# Altium PCB 175-00024_rev1, Backplane, Instrument Crate.PcbDoc (part 2 of 4)
Units mil, origin at the board's own origin, x right, y up, seen from the top; angles counter-clockwise.
Board outline 8400 x 10183.07 mil, 8 copper layers (Top Layer (*.GTL), Mid-Layer 1 (*.G1), +24V (*.GP1), RTN (*.GP2), +3.3V (*.GP3), +12V (*.GP4), Signal GND (*.GP5), Bottom Layer (*.GBL)); 192 components, 150 nets, 1439 pads, 415 vias.
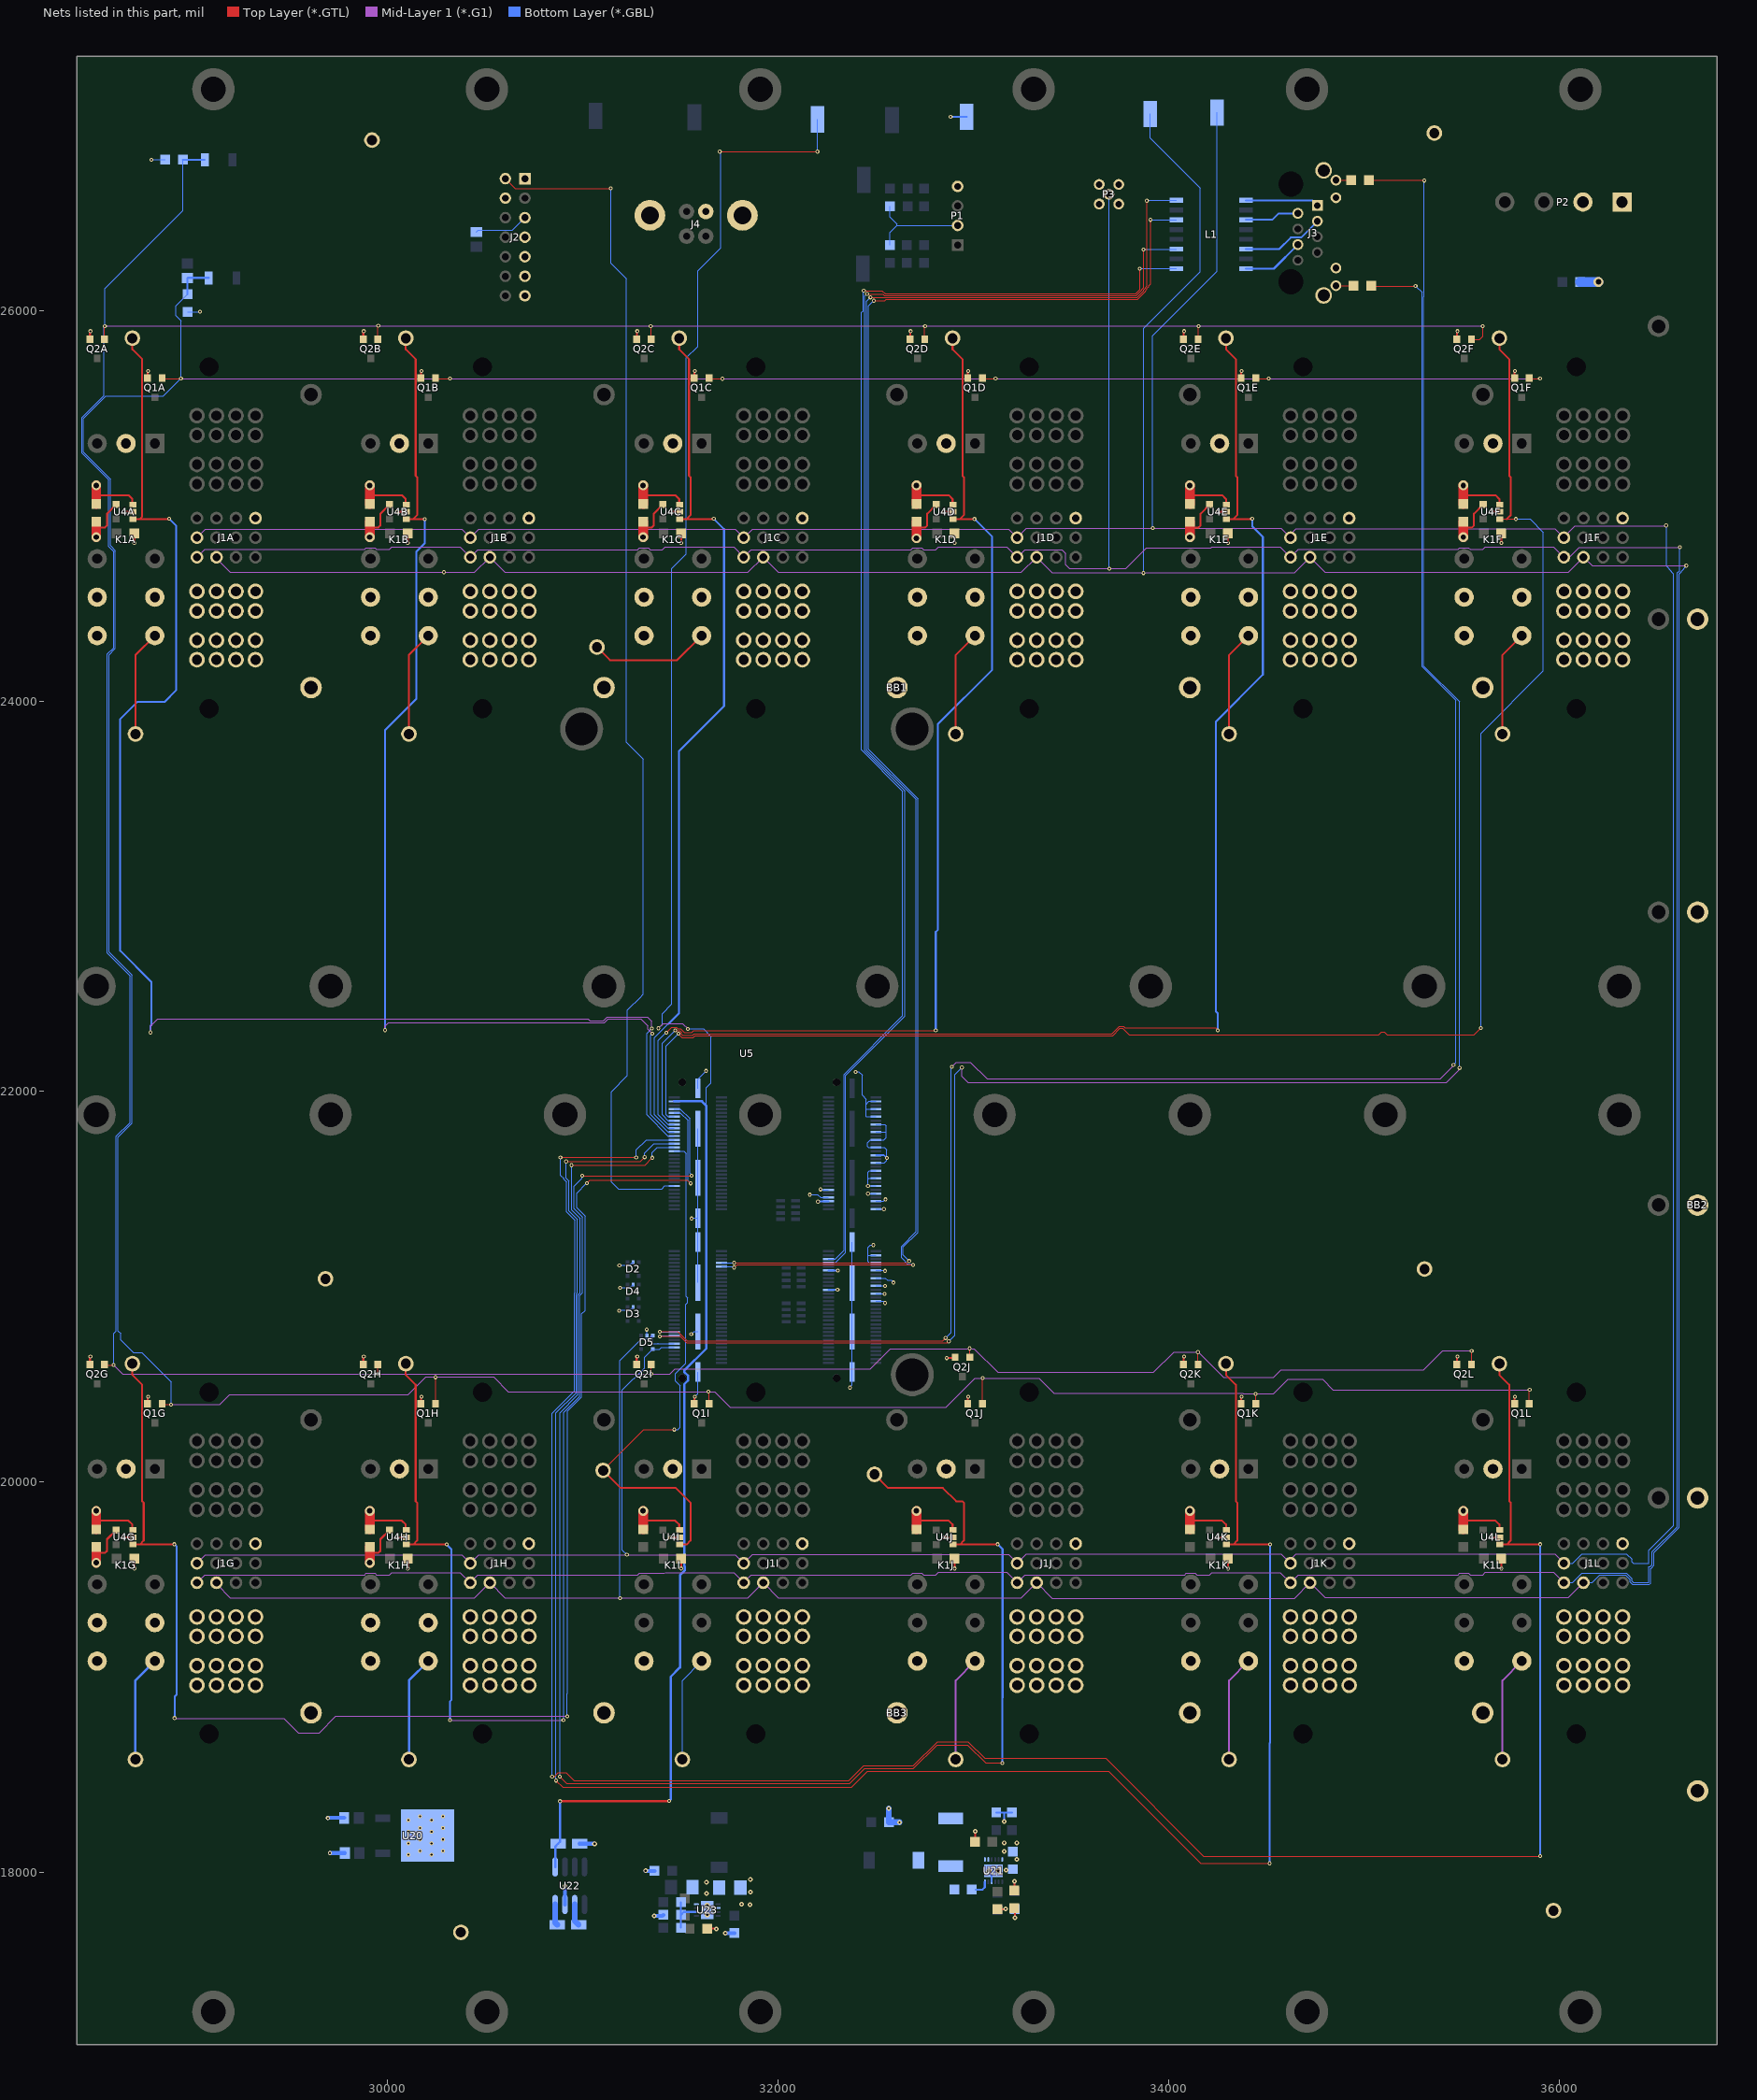
[diagram p8: the nets of this part, all layers, seen from the top]

## Via types
v1: diameter 20, hole 10, Top Layer (*.GTL) to Bottom Layer (*.GBL), 337 vias
v2: diameter 24, hole 10, Top Layer (*.GTL) to Bottom Layer (*.GBL), 48 vias
v3: diameter 50, hole 28, Top Layer (*.GTL) to Bottom Layer (*.GBL), 26 vias
v4: diameter 25.98, hole 12.99, Top Layer (*.GTL) to Bottom Layer (*.GBL), tented top, 4 vias

## Nets (pads, with @x,y where several pads share a name; then routed paths per layer and width w, separated by ;. In a path a pad name is that pad's centre, name@x,y a point inside that pad or via, vN(x,y) a via of type N, cw(c..) or ccw(c..) an arc to the next point about the centre after c; other vN are vias at no path point) (continued)
+24V: BB1.1 BB2.1 BB3.1 C15.2 C18.2 K1A.3 K1B.3 K1C.3 K1D.3 K1E.3 K1F.3 K1G.3 K1H.3 K1I.3 K1J.3 K1K.3 K1L.3 P2.1 P2.2 R4A.1 R4B.1 R4C.1 R4D.1 R4E.1 R4F.1 R4G.1 R4H.1 R4I.1 R4J.1 R4K.1 R4L.1 R29.1 R35.2 TP9.1 U4A.3 U4B.3 U4C.3 U4D.3 U4E.3 U4F.3 U4G.3 U4H.3 U4I.3 U4J.3 U4K.3 U4L.3 U5.B55 U5.B71 U5.B81 U21.12 U23.2 | length 4166.4
  Top Layer (*.GTL) w10: 28509.99,19797.82 28514.99,19802.82 28674.99,19802.82 28694.99,19782.82 28694.99,19757.82 U4G.3@28697.99,19754.82 ; 28510,25049 28515,25054 28675,25054 28695,25034 28695,25009 U4A.3@28698,25006 ; 29909.99,19797.82 29914.99,19802.82 30074.99,19802.82 30094.99,19782.82 30094.99,19757.82 U4H.3@30097.99,19754.82 ; 29910,25049 29915,25054 30075,25054 30095,25034 30095,25009 U4B.3@30098,25006 ; 31309.99,19797.82 31314.99,19802.82 31474.99,19802.82 31494.99,19782.82 31494.99,19757.82 U4I.3@31497.99,19754.82 ; 31310,25049 31315,25054 31475,25054 31495,25034 31495,25009 U4C.3@31498,25006 ; R35.2@31638.98,17714 31681.98,17714 v2(31684.98,17711) ; 32709.99,19797.82 32714.99,19802.82 32874.99,19802.82 32894.99,19782.82 32894.99,19757.82 U4J.3@32897.99,19754.82 ; 32710,25049 32715,25054 32875,25054 32895,25034 32895,25009 U4D.3@32898,25006 ; R29.1@33008.8,18158.34 33011.8,18161.34 v2(33011.8,18211.34) ; 34109.99,19797.82 34114.99,19802.82 34274.99,19802.82 34294.99,19782.82 34294.99,19757.82 U4K.3@34297.99,19754.82 ; 34110,25049 34115,25054 34275,25054 34295,25034 34295,25009 U4E.3@34298,25006 ; 35509.99,19797.82 35514.99,19802.82 35674.99,19802.82 35694.99,19782.82 35694.99,19757.82 U4L.3@35697.99,19754.82 ; 35510,25049 35515,25054 35675,25054 35695,25034 35695,25009 U4F.3@35698,25006
  Top Layer (*.GTL) w50: R4G.1@28509.99,19757.82 28509.99,19797.82 v3(28509.99,19852.82) ; R4A.1@28510,25009 28510,25049 v3(28510,25104) ; R4H.1@29909.99,19757.82 29909.99,19797.82 v3(29909.99,19852.82) ; R4B.1@29910,25009 29910,25049 v3(29910,25104) ; R4I.1@31309.99,19757.82 31309.99,19797.82 v3(31309.99,19852.82) ; R4C.1@31310,25009 31310,25049 v3(31310,25104) ; R4J.1@32709.99,19757.82 32709.99,19797.82 v3(32709.99,19852.82) ; R4D.1@32710,25009 32710,25049 v3(32710,25104) ; R4K.1@34109.99,19757.82 34109.99,19797.82 v3(34109.99,19852.82) ; R4E.1@34110,25009 34110,25049 v3(34110,25104) ; R4L.1@35509.99,19757.82 35509.99,19797.82 v3(35509.99,19852.82) ; R4F.1@35510,25009 35510,25049 v3(35510,25104)
  Bottom Layer (*.GBL) w10: v1(32205.89,21436.25) 32207.57,21437.94 U5.B55@32259.28,21437.94 ; U5.B81@32259.28,20985.18 32303.9,20985.18 v1@32304,20985.08 ; U5.B71@32259.28,21083.61 32307.53,21083.61 v1(32308,21084.08) ; v1(32885,26991.08) TP9.1@32967,26991.08
  other v1: 32306,20985
  other v2: 31857.98,17836 31813.98,17838 31859.98,17901 31858.98,17965 33223.8,18068.34 33158.8,18108.34 33158.8,18153.34 33223.8,18153.34
-12V: C16.2 TP28.1 U5.A3 U22.5 | length 10704.1
  Top Layer (*.GTL) w5: v1(31703,26813.08) v1(32203,26813.08)
  Top Layer (*.GTL) w12: v1(30885,18366.08) v1@31446,18366.08
  Mid-Layer 1 (*.G1) w5: v1(31388,22324.08) 31413,22349.08 31512,22349.08 v1(31540,22321.08)
  Bottom Layer (*.GBL) w5: v1(31388,22324.08) 31408,22344.08 31408,22399.08 31457,22448.08 31457,24679.08 31532,24754.08 31532,25758.08 31590,25816.08 31590,26202.08 31709,26321.08 31709,26807.08 v1(31703,26813.08) ; v1(31540,22321.08) 31619.08,22321.08 31658,22282.16 31658,22044.08 31635,22021.08 31635,21926.08 ; v1(32203,26813.08) 32204,26814.08 TP28.1@32204,26978.08
  Bottom Layer (*.GBL) w12: U22.5@30860,18030.06 30860,18133.6 C16.2@30875,18148.6 30885,18158.6 v1(30885,18366.08) ; v1(31443,18368.08) 31451,18376.08 31451,19003.08 31499,19051.08 31499,19523.55 31524.99,19549.53 31524.99,19566.1 31521,19570.09 31521,20042.73 31521.56,20043.29 31521.56,20092.35 31521,20092.91 31521,20500.82 31540.54,20520.36 31540.54,20545.28 31521,20564.82 31521,20571.08 31635,20685.08 31635,21926.08 31611.33,21949.75 U5.A3@31469.12,21949.75
EMU: J2.2 U5.A47 | length 6127.2
  Top Layer (*.GTL) w5: J2.2@30605,26675.08 30656,26624.08 31143,26624.08 v1(31144,26625.08)
  Bottom Layer (*.GBL) w5: v1@31145,26625.08 31145,26240.5 31224,26161.5 31224,23788.99 31300.14,23712.85 31302.77,23710.22 31305.41,23707.58 31308.04,23704.95 31310.68,23702.31 31310.68,22498.49 31308.04,22495.85 31305.41,22493.22 31302.77,22490.58 31300.14,22487.94 31230,22417.81 31230,22081.81 31148,21999.81 31148,21537.35 31184.7,21500.65 31405.97,21500.65 31422,21516.68 U5.A47@31469.12,21516.68
ETHERLED_ACT: R7.1 U5.A103 | length 9913.1
  Top Layer (*.GTL) w5: v1(31396,20770.8) 31489,20770.8 31536.73,20723.08 32844,20723.08 v1(32859,20738.08) ; R7.1@35041,26125.08 v1(35266,26125.08)
  Mid-Layer 1 (*.G1) w5: v1(32891,22126.08) 32915,22150.08 32987,22150.08 33071.2,22065.88 35393,22065.88 35460,22132.88 v1(35460,22137.08)
  Bottom Layer (*.GBL) w5: v1(31396,20770.8) 31398.16,20768.65 U5.A103@31469.12,20768.65 ; v1(32859,20738.08) 32887,20766.08 32887,22122.08 v1(32891,22126.08) ; v1(35266,26125.08) 35299,26092.08 35299,24175.08 35471.2,24002.88 35471.2,22149.28 v1@35459,22137.08
ETHERLED_FD: R6.1 U5.A105 | length 10547.7
  Top Layer (*.GTL) w5: v1(31396,20746.8) 31500.28,20746.8 31533,20714.08 32868.94,20714.08 v1(32875.97,20721.11) ; R6.1@35026,26667.08 35308,26667.08 v1(35310,26665.08)
  Mid-Layer 1 (*.G1) w5: v1(32943,22123.08) 32943,22078.08 32975,22046.08 35424,22046.08 35491,22113.08 v1(35491,22121.08)
  Bottom Layer (*.GBL) w5: v1(31396,20746.8) 31398.16,20748.96 U5.A105@31469.12,20748.96 ; v1(32875.97,20721.11) 32906.8,20751.94 32906.8,22086.88 v1(32943,22123.08) ; v1(35310,26665.08) 35310,26071.08 35308,26069.08 35308,24178.81 35491,23995.81 v1(35491,22121.08)
ETHERRX+: L1.11 U5.B67 | length 7037
  Top Layer (*.GTL) w5: v1(32457.09,26083.99) 32538.54,26083.99 32546.51,26076.02 33835.73,26076.02 33864,26104.29 33864,26108.02 33873,26117.02 v1(33873,26312.08)
  Bottom Layer (*.GBL) w5: U5.B67@32259.28,21122.98 32295,21122.98 32348,21175.98 32348,22083.08 32651,22386.08 32651,23540.08 32446,23745.08 32446,26072.9 v1(32457.09,26083.99) ; v1(33873,26312.08) 33875,26314.08 L1.11@34042,26314.08
ETHERRX-: L1.9 U5.B65 | length 6954.4
  Top Layer (*.GTL) w5: v1(32440.12,26100.96) 32534.3,26100.96 32550.24,26085.02 33832,26085.02 33855,26108.02 v1@33855,26214.08
  Bottom Layer (*.GBL) w5: U5.B65@32259.28,21142.66 32295,21142.66 32339,21186.66 32339,22086.81 32640,22387.81 32640,23538.35 32429,23749.35 32429,25990.08 32437,25998.08 32437,26097.84 v1(32440.12,26100.96) ; v1(33854,26213.08) 33855,26214.08 L1.9@34042,26214.08
ETHERTX+: L1.16 U5.A70 | length 8161.2
  Top Layer (*.GTL) w5: v1(31776,21098.98) 31791,21113.98 32690.5,21113.98 v1(32692,21112.48) ; v1(32474.06,26067.02) 33839.46,26067.02 33873,26100.56 33873,26104.29 33882,26113.29 33882,26117.02 33891,26126.02 v1@33891,26564.08
  Bottom Layer (*.GBL) w5: U5.A70@31712.43,21103.29 31771.69,21103.29 v1(31776,21098.98) ; v1(32474.06,26067.02) 32455,26047.96 32455,23748.81 32708,23495.81 32708,21282.53 32633,21207.53 32633,21148.15 32665.37,21115.78 32688.7,21115.78 v1(32692,21112.48) ; v1(33890,26562.08) 33892,26564.08 L1.16@34042,26564.08
ETHERTX-: L1.14 U5.A68 | length 7963.7
  Top Layer (*.GTL) w5: v1(31776,21122.98) 32662.9,21122.98 v1(32672.2,21132.28) ; v1(32491.03,26050.05) 32547.03,26050.05 32555,26058.02 33843.18,26058.02 33882,26096.84 33882,26100.56 33891,26109.56 33891,26113.29 33900,26122.29 33900,26126.02 33909,26135.02 v1@33909,26464.08
  Bottom Layer (*.GBL) w5: U5.A68@31712.43,21122.98 v1(31776,21122.98) ; v1(32491.03,26050.05) 32464,26023.02 32464,23752.53 32717,23499.53 32717,21278.81 32642,21203.81 32642,21162.48 v1(32672.2,21132.28) ; v1(33908,26464.08) L1.14@34042,26464.08
GND: C2A.1 C2B.1 C2C.1 C2D.1 C2E.1 C2F.1 C2G.1 C2H.1 C2I.1 C2J.1 C2K.1 C2L.1 C3.1 C4.1 C10.2 C12.2 C13.1 C14.1 C15.1 C16.1 C18.1 C19.1 D2.2 D3.2 D4.2 D5.2 J1A.12 J1B.12 J1C.12 J1D.12 J1E.12 J1F.12 J1G.12 J1H.12 J1I.12 J1J.12 J1K.12 J1L.12 J2.1 J2.4 J2.7 J2.9 J2.11 J2.13 J3.10 J3.11 J3.13 J3.14 J4.4 J4.5 J4.6 P1.2 P1.4 P3.2 P3.3 P3.4 P3.5 Q1A.2 Q1B.2 Q1C.2 Q1D.2 Q1E.2 Q1F.2 Q1G.2 Q1H.2 Q1I.2 Q1J.2 Q1K.2 Q1L.2 Q2A.2 Q2B.2 Q2C.2 Q2D.2 Q2E.2 Q2F.2 Q2G.2 Q2H.2 Q2I.2 Q2J.2 Q2K.2 Q2L.2 R1.2 R2.1 R3.1 R30.1 R31.1 R34.1 R38.1 R39.1 R40.1 TP1.1 TP2.1 TP3.1 TP6.1 TP7.1 TP8.1 U4A.2 U4B.2 U4C.2 U4D.2 U4E.2 U4F.2 U4G.2 U4H.2 U4I.2 U4J.2 U4K.2 U4L.2 U5.A121 U5.A122 U5.B4 U5.B8 U5.B12 U5.B16 U5.B20 U5.B24 U5.B28 U5.B32 U5.B36 U5.B40 U5.B44 U5.B48 U5.B49 U5.B52 U5.B53 U5.B56 U5.B60 U5.B64 U5.B68 U5.B72 U5.B76 U5.B80 U5.B84 U5.B88 U5.B122 U20.2 U21.4 U21.13 U22.3 U23.8 U23.9 | length 7872.7
  Top Layer (*.GTL) w10: Q2G.2@28477.59,20599.08 Q2G.2@28477.59,20602.03 v1@28477.59,20640.42 ; Q2A.2@28477.6,25850.26 Q2A.2@28477.6,25853.21 v1@28477.6,25891.6 ; v1(28649.99,19717.82) U4G.2@28697.99,19717.82 ; v1(28650,24969) U4A.2@28698,24969 ; v1(28704.99,19557.82) C2G.1@28704.99,19607.82 ; v1(28705,24809) C2A.1@28705,24859 ; Q1G.2@28772.59,20399.08 Q1G.2@28772.59,20402.03 28772.59,20435.42 v1(28774.99,20437.82) ; Q1A.2@28772.6,25650.26 Q1A.2@28772.6,25653.21 28772.6,25686.6 v1(28775,25689) ; Q2H.2@29877.59,20599.08 Q2H.2@29877.59,20602.03 v1@29877.59,20640.42 ; Q2B.2@29877.6,25850.26 Q2B.2@29877.6,25853.21 v1@29877.6,25891.6 ; v1(30049.99,19717.82) U4H.2@30097.99,19717.82 ; v1(30050,24969) U4B.2@30098,24969 ; v1(30104.99,19557.82) C2H.1@30104.99,19607.82 ; v1(30105,24809) C2B.1@30105,24859 ; Q1H.2@30172.59,20399.08 Q1H.2@30172.59,20402.03 30172.59,20435.42 v1(30174.99,20437.82) ; Q1B.2@30172.6,25650.26 Q1B.2@30172.6,25653.21 30172.6,25686.6 v1(30175,25689) ; Q2I.2@31277.59,20599.08 Q2I.2@31277.59,20602.03 v1@31277.59,20640.42 ; Q2C.2@31277.6,25850.26 Q2C.2@31277.6,25853.21 v1@31277.6,25891.6 ; v1(31449.99,19717.82) U4I.2@31497.99,19717.82 ; v1(31450,24969) U4C.2@31498,24969 ; v1(31504.99,19557.82) C2I.1@31504.99,19607.82 ; v1(31505,24809) C2C.1@31505,24859 ; Q1I.2@31572.59,20399.08 Q1I.2@31572.59,20402.03 31572.59,20435.42 v1(31574.99,20437.82) ; Q1C.2@31572.6,25650.26 Q1C.2@31572.6,25653.21 31572.6,25686.6 v1(31575,25689) ; Q2D.2@32677.6,25850.26 Q2D.2@32677.6,25853.21 v1@32677.6,25891.6 ; v1(32849.99,19717.82) U4J.2@32897.99,19717.82 ; v1(32850,24969) U4D.2@32898,24969 ; v1(32864.5,20635.14) 32865.76,20636.4 Q2J.2@32908.1,20636.4 ; v1(32904.99,19557.82) C2J.1@32904.99,19607.82 ; v1(32905,24809) C2D.1@32905,24859 ; Q1J.2@32972.59,20399.08 Q1J.2@32972.59,20402.03 32972.59,20435.42 v1(32974.99,20437.82) ; Q1D.2@32972.6,25650.26 Q1D.2@32972.6,25653.21 32972.6,25686.6 v1(32975,25689) ; R34.1@33123.8,17813.34 33165.8,17813.34 v2(33166.8,17814.34) ; C14.1@33211.8,17908.34 33211.8,17954.34 v2(33212.8,17955.34) ; Q2K.2@34077.59,20599.08 Q2K.2@34077.59,20602.03 v1@34077.59,20640.42 ; Q2E.2@34077.6,25850.26 Q2E.2@34077.6,25853.21 v1@34077.6,25891.6 ; v1(34249.99,19717.82) U4K.2@34297.99,19717.82 ; v1(34250,24969) U4E.2@34298,24969 ; v1(34304.99,19557.82) C2K.1@34304.99,19607.82 ; v1(34305,24809) C2E.1@34305,24859 ; Q1K.2@34372.59,20399.08 Q1K.2@34372.59,20402.03 34372.59,20435.42 v1(34374.99,20437.82) ; Q1E.2@34372.6,25650.26 Q1E.2@34372.6,25653.21 34372.6,25686.6 v1(34375,25689) ; Q2L.2@35477.59,20599.08 Q2L.2@35477.59,20602.03 v1@35477.59,20640.42 ; Q2F.2@35477.6,25850.26 Q2F.2@35477.6,25853.21 v1@35477.6,25891.6 ; v1(35649.99,19717.82) U4L.2@35697.99,19717.82 ; v1(35650,24969) U4F.2@35698,24969 ; v1(35704.99,19557.82) C2L.1@35704.99,19607.82 ; v1(35705,24809) C2F.1@35705,24859 ; Q1L.2@35772.59,20399.08 Q1L.2@35772.59,20402.03 35772.59,20435.42 v1(35774.99,20437.82) ; Q1F.2@35772.6,25650.26 Q1F.2@35772.6,25653.21 35772.6,25686.6 v1(35775,25689)
  Bottom Layer (*.GBL) w5: v1(28793,26772.08) R3.1@28863,26772.08 ; R2.1@28977,25993.08 v1(29042,25993.08) ; v1(31188,20877.6) 31190.66,20880.26 31242.53,20880.26 31258.88,20896.6 D3.2@31259.53,20896.6 D3.2@31259.53,20891.13 ; v1(31189,21109.6) 31189.66,21110.26 31242.53,21110.26 31258.88,21126.6 D2.2@31259.53,21126.6 D2.2@31259.53,21121.13 ; v1(31193,20994.6) 31193.66,20995.26 31242.53,20995.26 31258.88,21011.6 D4.2@31259.53,21011.6 D4.2@31259.53,21006.13 ; D5.2@31329.53,20751.6 v1(31329.53,20781.13) ; v1(31557,20758.08) 31570.52,20771.6 U5.A122@31590.78,20771.6 ; v1(31558,21350.08) 31559.44,21351.52 U5.A121@31590.78,21351.52 ; v1(31574.99,20437.82) 31590.78,20453.61 U5.A122@31590.78,20564.12 ; U5.A122@31590.78,21021.6 U5.A122@31590.78,21229.08 U5.A121@31590.78,21351.52 ; U5.A121@31590.78,21809 31590.5,21808.72 31590.5,21559.28 U5.A121@31590.78,21559 U5.A121@31590.78,21351.52 ; U5.A121@31590.78,22016.48 31590.78,22063.85 v1(31633,22106.08) ; v1(32164,21472) 32204.08,21472 32219,21457.08 32219.54,21457.62 U5.B53@32259.28,21457.62 ; v1(32219,21499.08) 32221.09,21496.99 U5.B49@32259.28,21496.99 ; v1(32370,20484.08) 32370,20487.21 32380.93,20498.15 U5.B122@32380.93,20564.12 U5.B122@32380.93,20771.6 U5.B122@32380.93,21021.6 U5.B122@32380.93,21229.08 ; v1(32398,22101.08) 32415,22101.08 32432,22084.08 32432,21981.08 32453,21960.08 32453,21935.08 ; 32453.7,21910.38 U5.B8@32502.59,21910.38 ; 32461.27,21162.35 U5.B64@32502.59,21162.35 ; v1(32462,21477.08) 32460.46,21477.08 32460.23,21477.31 U5.B52@32502.59,21477.31 ; v1(32462,21516.08) v1@32462,21516.68 ; v1(32489,21214.08) 32474,21214.08 32461,21201.08 32461,21129.08 32467.1,21122.98 U5.B68@32502.59,21122.98 ; U5.B88@32502.59,20926.13 32539.95,20926.13 v1(32549,20917.08) ; U5.B84@32502.59,20965.5 32545.58,20965.5 v1(32547,20964.08) ; U5.B80@32502.59,21004.87 32547.79,21004.87 v1@32548,21005.08 ; U5.B76@32502.59,21044.24 32551.51,21044.24 32561.17,21034.58 32580.5,21034.58 v1(32593,21022.08) ; U5.B72@32502.59,21083.61 32546.47,21083.61 v1@32548,21082.08 ; U5.B60@32502.59,21398.57 32542.51,21398.57 v1(32543,21398.08) ; U5.B56@32502.59,21437.94 32540.86,21437.94 v1(32551,21448.08) ; U5.B48@32502.59,21516.68 v1@32462,21516.68 ; U5.B44@32502.59,21556.05 32465.97,21556.05 32462,21552.08 ; U5.B40@32502.59,21595.42 32469.34,21595.42 32462,21588.08 32462,21552.08 ; U5.B36@32502.59,21634.79 32544.71,21634.79 32558,21648.08 v1(32558,21660.08) 32558,21676.08 32558,21701.08 32545.55,21713.53 U5.B28@32502.59,21713.53 32464.55,21713.53 32459,21719.08 32459,21739.08 32472.82,21752.9 U5.B24@32502.59,21752.9 32543.82,21752.9 32555,21764.08 32555,21792.08 ; U5.B20@32502.59,21792.27 32554.81,21792.27 32555,21792.08 ; U5.B16@32502.59,21831.64 32547.44,21831.64 32555,21824.08 32555,21792.08 ; U5.B12@32502.59,21871.01 32453.07,21871.01 32453,21871.08 32453,21935.08 ; U5.B4@32502.59,21949.75 32467.67,21949.75 32453,21935.08 ; C3.1@32575,26334.08 32575,26399.08 32611,26435.08 ; C4.1@32575,26534.08 32575,26479.08 32611,26443.08 32611,26435.08 ; P1.2@32921,26435.08 32611,26435.08 ; v1@32462,21516.68 32462,21552.08
  Bottom Layer (*.GBL) w8: U5.B32@32502.59,21674.16 32543.92,21674.16 v1(32558,21660.08)
  Bottom Layer (*.GBL) w10: U21.4@33095.65,17953.34 33095.65,18001.57 U21.13@33104.51,18010.43 ; R30.1@33118.8,18308.34 33159.8,18308.34 ; v2(33159.8,18261.34) 33159.8,18308.34 ; R31.1@33198.8,18308.34 33159.8,18308.34
  Bottom Layer (*.GBL) w20: v1(29696,18280) 29697,18281 C12.2@29779.6,18281 ; v1(29707,18101) C10.2@29782.6,18101 ; U22.3@30910,17837.14 v2(30910,17931.6) ; C16.1@30985,18148.6 v2(31062,18148.6) ; v2(31322.98,18010) 31323.98,18009 R38.1@31368.98,18009 ; v2(31366.98,17779) 31408.98,17779 R39.1@31413.98,17784 ; v2(31731.98,17691) R40.1@31777.98,17691
  Bottom Layer (*.GBL) w30: v2(32568.8,18328.34) C13.1@32568.8,18258.34 v2(32623.8,18258.34)
  Bottom Layer (*.GBL) w50: R1.2@36107.48,26146.08 v3(36202.48,26146.08)
  other v1: 28479.99,20642.82 29879.99,20642.82 31279.99,20642.82 34079.99,20642.82 35479.99,20642.82 32549,21005 32549,21082 28480,25894 29880,25894 31280,25894 32680,25894 34080,25894 35480,25894
  other v2: 31635,17894 31634,17951 33168.8,18013.34
  other v4: 31638.98,17785.38 31638.98,17832.62 33080.89,18010.43 33128.13,18010.43
GPS_DATA: J1A.1 J1B.1 J1C.1 J1D.1 J1E.1 J1F.1 J1G.1 J1H.1 J1I.1 J1J.1 J1K.1 J1L.1 P3.1 | length 22990.9
  Mid-Layer 1 (*.G1) w5: J1G.1@29025.5,19485.14 29065.78,19525.42 29884.07,19525.42 29891.64,19532.98 29937.79,19532.98 29945.35,19525.42 30010.92,19525.42 30022.92,19537.42 30373.22,19537.42 J1H.1@30425.5,19485.14 30464.78,19524.42 31283.07,19524.42 31291.64,19532.98 31418.48,19532.98 31422.16,19536.65 31773.99,19536.65 J1I.1@31825.5,19485.14 31864.78,19524.42 32683.07,19524.42 32691.64,19532.98 32737.79,19532.98 32746.35,19524.42 32809.92,19524.42 32823.92,19538.42 33172.22,19538.42 J1J.1@33225.5,19485.14 33264.78,19524.42 34083.07,19524.42 34091.64,19532.98 34137.79,19532.98 34146.35,19524.42 34209.92,19524.42 34222.92,19537.42 34573.22,19537.42 J1K.1@34625.5,19485.14 34665.78,19525.42 35484.07,19525.42 35491.64,19532.98 35537.79,19532.98 35545.35,19525.42 35610.92,19525.42 35623.92,19538.42 35972.22,19538.42 J1L.1@36025.5,19485.14 ; J1A.1@29025.51,24736.32 29065.79,24776.6 29884.08,24776.6 29891.65,24784.16 29937.8,24784.16 29945.36,24776.6 30010.93,24776.6 30022.93,24788.6 30373.24,24788.6 J1B.1@30425.51,24736.32 30464.79,24775.6 31283.08,24775.6 31291.65,24784.16 31337.8,24784.16 31346.36,24775.6 31409.93,24775.6 31422.17,24787.83 31774,24787.83 J1C.1@31825.51,24736.32 31864.79,24775.6 32683.08,24775.6 32691.65,24784.16 32737.8,24784.16 32746.36,24775.6 32809.93,24775.6 32823.93,24789.6 33172.24,24789.6 J1D.1@33225.51,24736.32 33264.79,24775.6 33455.48,24775.6 33475,24756.08 33475,24697.08 33493,24679.08 33781.99,24679.08 33887.07,24784.16 34218.5,24784.16 34222.93,24788.6 34573.24,24788.6 J1E.1@34625.51,24736.32 34665.79,24776.6 35484.08,24776.6 35491.65,24784.16 35537.8,24784.16 35545.36,24776.6 35610.93,24776.6 35623.93,24789.6 35972.24,24789.6 J1F.1@36025.51,24736.32 36053.24,24736.32 36104,24787.08 v1(36619,24787.08)
  Bottom Layer (*.GBL) w5: P3.1@33696,26595.08 33696,24679.08 v1(33697,24678.08) ; J1L.1@36025.5,19485.14 36070.35,19485.14 36118.35,19533.14 36345.38,19533.14 36373.5,19505.02 36373.5,19492.3 36380.65,19485.14 36460,19485.14 36460,19567.14 36467.46,19567.14 36478,19577.69 36478,19643.62 36606,19771.62 36606,24656.81 36611.27,24662.08 36615,24662.08 36618.5,24665.58 v1@36618.5,24787.08
I2C_SCL: D5.4 J1A.5 J1B.5 J1C.5 J1D.5 J1E.5 J1F.5 J1G.5 J1H.5 J1I.5 J1J.5 J1K.5 J1L.5 TP13.1 U5.A111 | length 24314
  Mid-Layer 1 (*.G1) w5: J1G.5@29025.5,19585.14 29068.78,19628.42 30382.22,19628.42 J1H.5@30425.5,19585.14 30468.78,19628.42 31782.22,19628.42 J1I.5@31825.5,19585.14 31869.78,19629.42 33181.22,19629.42 J1J.5@33225.5,19585.14 33272.78,19632.42 34578.22,19632.42 J1K.5@34625.5,19585.14 34625.5,19602.93 34653.99,19631.42 35979.22,19631.42 J1L.5@36025.5,19585.14 ; J1A.5@29025.51,24836.32 29068.79,24879.6 30382.24,24879.6 J1B.5@30425.51,24836.32 30468.79,24879.6 31782.24,24879.6 J1C.5@31825.51,24836.32 31869.79,24880.6 33181.24,24880.6 J1D.5@33225.51,24836.32 33272.79,24883.6 34578.24,24883.6 J1E.5@34625.51,24836.32 34625.51,24854.11 34654,24882.6 35979.24,24882.6 J1F.5@36025.51,24836.32 36025.51,24838.59 36083,24896.08 36546,24896.08 v1(36549,24899.08)
  Bottom Layer (*.GBL) w5: v1(31227,19629.08) 31204,19652.08 31204,20471.08 31317.4,20584.48 31317.4,20639.08 D5.4@31359.06,20680.73 31394.13,20680.73 31403.31,20689.91 U5.A111@31469.12,20689.91 ; v1(33920,24885.08) 33920,25871.08 34249,26200.08 TP13.1@34249,27013.08 ; J1L.5@36025.5,19585.14 36070.35,19585.14 36118.35,19633.14 36345.38,19633.14 36373.5,19605.02 36373.5,19592.3 36380.65,19585.14 36460,19585.14 36460,19651.08 36588,19779.08 36588,24653.08 36584.27,24653.08 36575.5,24661.85 36575.5,24665.58 36550.5,24690.58 36550.5,24897.58 v1(36549,24899.08)
I2C_SDA: D5.3 J1A.2 J1B.2 J1C.2 J1D.2 J1E.2 J1F.2 J1G.2 J1H.2 J1I.2 J1J.2 J1K.2 J1L.2 TP12.1 U5.A109 | length 25042.3
  Mid-Layer 1 (*.G1) w5: J1G.2@29125.5,19485.14 29125.5,19477.91 29195.99,19407.42 30447.78,19407.42 J1H.2@30525.5,19485.14 30603.22,19407.42 31847.78,19407.42 J1I.2@31925.5,19485.14 32003.22,19407.42 33247.78,19407.42 J1J.2@33325.5,19485.14 33405.22,19405.42 34645.78,19405.42 J1K.2@34725.5,19485.14 34801.99,19408.65 36049.01,19408.65 J1L.2@36125.5,19485.14 ; J1A.2@29125.51,24736.32 29125.51,24729.09 29196,24658.6 30447.79,24658.6 J1B.2@30525.51,24736.32 30603.24,24658.6 31847.79,24658.6 J1C.2@31925.51,24736.32 32003.24,24658.6 33247.79,24658.6 J1D.2@33325.51,24736.32 33405.24,24656.6 34645.79,24656.6 J1E.2@34725.51,24736.32 34802,24659.83 36049.02,24659.83 J1F.2@36125.51,24736.32 36169.76,24692.08 36651,24692.08 v1(36652,24693.08)
  Bottom Layer (*.GBL) w5: v1(31192,19406.08) 31192,20623.08 31304.18,20735.26 31340.09,20735.26 31356.44,20751.6 D5.3@31359.06,20751.6 31359.06,20710.54 ; 31360,20709.59 31386.99,20709.59 ; 31386.99,20710.61 31386.99,20709.59 ; U5.A109@31469.12,20709.59 31386.99,20709.59 ; v1(33873,24655.08) 33873,25909.08 34163,26199.08 34163,26627.08 33907,26883.08 TP12.1@33907,27006.08 ; J1L.2@36125.5,19485.14 36170.35,19485.14 36209.35,19524.14 36341.65,19524.14 36364.5,19501.3 36364.5,19488.57 36376.93,19476.14 36463.73,19476.14 36469,19481.41 36469,19558.14 36471.18,19558.14 36487,19573.96 36487,19639.89 36615,19767.89 36615,24653.08 36618.73,24653.08 36627.5,24661.85 36627.5,24665.58 v1@36652.5,24690.58
  other v1: 30290,24659.6
IMON_SLOT1: TP11A.1 U4A.1 U5.A21 | length 7363.1
  Top Layer (*.GTL) w10: TP11A.1@28695,25858 28695,25800.64 28745.5,25750.14 28745.5,24944.5 28733,24932 ; U4A.1@28698,24932 28733,24932 ; v1(28883,24934.08) 28880.92,24932 28733,24932
  Mid-Layer 1 (*.G1) w5: v1(28787.95,22302.86) 28787.95,22337.03 28824,22373.08 31029,22373.08 31039,22363.08 31107.38,22363.08 31126.38,22382.08 31332,22382.08 31355,22359.08 v1(31355,22323.08)
  Bottom Layer (*.GBL) w5: v1(31355,22323.08) 31329.57,22297.65 31329.57,21881.01 31438,21772.58 U5.A21@31469.12,21772.58
  Bottom Layer (*.GBL) w10: v1(28787.95,22302.86) 28787.95,22337.03 28792,22341.08 28792,22562.08 28633,22721.08 28633,23907.88 28720.2,23995.08 28859.2,23995.08 28920,24055.88 28920,24897.08 v1(28883,24934.08)
IMON_SLOT2: TP11B.1 U4B.1 U5.A19 | length 5774.9
  Top Layer (*.GTL) w10: TP11B.1@30095,25858 30095,25800.64 30145.5,25750.14 30145.5,25153.5 30153,25146 30153,24952 30133,24932 ; U4B.1@30098,24932 30133,24932 ; v1(30192,24931.08) 30191.08,24932 30133,24932
  Mid-Layer 1 (*.G1) w5: v1(29988.74,22314.67) 29988.74,22334.82 30007,22353.08 31111.52,22353.08 31130.52,22372.08 31299,22372.08 31334,22337.08 31334,22320.08 v1(31358,22296.08)
  Bottom Layer (*.GBL) w5: v1(31358,22296.08) 31349.26,22287.34 31349.26,21881.01 31438,21792.27 U5.A19@31469.12,21792.27
  Bottom Layer (*.GBL) w10: v1(29988.74,22314.67) 29989,22314.93 29989,23851.08 30149,24011.08 30149,24765.08 30192,24808.08 v1(30192,24931.08)
IMON_SLOT3: TP11C.1 U4C.1 U5.A17 | length 4483
  Top Layer (*.GTL) w10: TP11C.1@31495,25858 31495,25800.64 31545.5,25750.14 31545.5,25153.5 31553,25146 31553,24952 31533,24932 ; U4C.1@31498,24932 31533,24932 ; v1(31672,24933.08) 31670.92,24932 31533,24932
  Bottom Layer (*.GBL) w5: 31440.09,22346.99 31368.94,22275.85 31368.94,21881.01 31438,21811.95 U5.A17@31469.12,21811.95
  Bottom Layer (*.GBL) w10: 31440.09,22346.99 31494,22400.9 31494,23742.88 31725,23973.88 31725,24880.08 v1(31672,24933.08)
IMON_SLOT4: TP11D.1 U4D.1 U5.A15 | length 5788.9
  Top Layer (*.GTL) w5: v1(31429,22301.08) 31457.06,22329.14 ; 31457.06,22329.55 31480.86,22329.55 31488.83,22321.58 31501.56,22321.58 31521.06,22302.08 31559.46,22302.08 31569.46,22312.08 v1@32809,22312.08
  Top Layer (*.GTL) w10: TP11D.1@32895,25858 32895,25800.64 32945.5,25750.14 32945.5,25153.5 32953,25146 32953,24952 32933,24932 ; U4D.1@32898,24932 32933,24932 ; v1(33007,24932.08) 33006.92,24932 32933,24932
  Bottom Layer (*.GBL) w5: v1@31428.56,22301.52 31388.63,22261.59 31388.63,21881.01 31438,21831.64 U5.A15@31469.12,21831.64
  Bottom Layer (*.GBL) w10: v1(32809,22313.08) 32809,22817.08 32819,22827.08 32819,23880.88 33098,24159.88 33098,24841.08 v1(33007,24932.08)
IMON_SLOT5: TP11E.1 U4E.1 U5.A13 | length 7193.5
  Top Layer (*.GTL) w5: v1(31474.03,22313.05) 31479.33,22307.75 31484.17,22312.58 31497.83,22312.58 31507.5,22302.91 31507.5,22292.31 31511.73,22288.08 31564.73,22288.08 31572.73,22296.08 33710.94,22296.08 33748.44,22333.58 33769.56,22333.58 33777.06,22326.08 34241,22326.08 v1(34253,22314.08)
  Top Layer (*.GTL) w10: TP11E.1@34295,25858 34295,25800.64 34345.5,25750.14 34345.5,25153.5 34353,25146 34353,24952 34333,24932 ; U4E.1@34298,24932 34333,24932 ; v1(34429,24933.08) 34427.92,24932 34333,24932
  Bottom Layer (*.GBL) w5: U5.A13@31469.12,21851.32 31438,21851.32 31408.31,21881.01 31408.31,22247.33 v1(31474.03,22313.05)
  Bottom Layer (*.GBL) w10: v1(34253,22314.08) 34253,22400.08 34244,22409.08 34244,23895.08 34484,24135.08 34484,24840.08 34429,24895.08 v1(34429,24933.08)
IMON_SLOT6: TP11F.1 U4F.1 U5.A11 | length 8544
  Top Layer (*.GTL) w5: v1(31491,22296.08) 31510,22277.08 31566.46,22277.08 31576.46,22287.08 33714.67,22287.08 33752.17,22324.58 33765.83,22324.58 33799.33,22291.08 35076.67,22291.08 35091.17,22305.58 35104.83,22305.58 35119.33,22291.08 35566,22291.08 v1(35600,22325.08) v1@35601,22325.08 ; U4F.1@35698,24932 35733,24932 35778.92,24932 v1(35779,24932.08)
  Top Layer (*.GTL) w10: TP11F.1@35695,25858 35695,25800.64 35745.5,25750.14 35745.5,25153.5 35753,25146 35753,24952 35733,24932
  Bottom Layer (*.GBL) w5: U5.A11@31469.12,21871.01 31438,21871.01 31428,21881.01 31428,22233.08 v1(31491,22296.08) ; v1(35600,22325.08) 35601,22326.08 35601,23835.08 35920,24154.08 35920,24864.08 35852,24932.08 v1(35779,24932.08)
IMON_SLOT7: TP11G.1 U4G.1 U5.A9 | length 7912.7
  Top Layer (*.GTL) w5: v1(31022,21531.08) 31023,21531.08 31038,21546.08 31536.92,21546.08 v1(31553,21530)
  Top Layer (*.GTL) w10: TP11G.1@28694.99,20606.82 28694.99,20549.46 28745.49,20498.96 28745.49,19902.32 28752.99,19894.82 28752.99,19700.82 28732.99,19680.82 ; U4G.1@28697.99,19680.82 28732.99,19680.82 ; v1(28910,19682.08) 28908.74,19680.82 28732.99,19680.82
  Mid-Layer 1 (*.G1) w5: v1@28911,18791.08 29470.54,18791.08 29545.54,18716.08 29652.27,18716.08 29737.07,18800.88 v1(30921.8,18800.88)
  Bottom Layer (*.GBL) w5: v1(30921.8,18800.88) 30921.8,18915.88 30924,18918.08 30924,20365.26 30994.77,20436.03 30994.77,20861.03 31013,20879.26 31013,21362.08 30970,21405.08 30970,21479.08 v1(31022,21531.08) ; U5.A9@31469.12,21890.69 31501,21890.69 31540,21851.69 31540,21543 v1(31553,21530)
  Bottom Layer (*.GBL) w10: v1(28910,19682.08) 28922,19670.08 28922,18912.95 28912,18902.95 28912,18793.08 v1(28911,18792.08)
IMON_SLOT8: TP11H.1 U4H.1 U5.A7 | length 6485.4
  Top Layer (*.GTL) w5: v1(30998,21569.08) v1@31564,21569.08
  Top Layer (*.GTL) w10: TP11H.1@30094.99,20606.82 30094.99,20549.46 30145.49,20498.96 30145.49,19902.32 30152.99,19894.82 30152.99,19700.82 30132.99,19680.82 ; U4H.1@30097.99,19680.82 30132.99,19680.82 ; v1(30304.74,19680.82) 30132.99,19680.82
  Mid-Layer 1 (*.G1) w5: v1@30322,18781.08 v1(30902,18781.08)
  Bottom Layer (*.GBL) w5: v1(30902,18781.08) 30904,18783.08 30904,18918.08 30904,20357.99 30985.77,20439.76 30985.77,20954.85 31000,20969.08 31000,21356.69 30957,21399.69 30957,21516.08 30998,21557.08 v1(30998,21569.08) ; U5.A7@31469.12,21910.38 31501,21910.38 31550,21861.38 31550,21581.76 31562.68,21569.08 v1@31564,21569.08
  Bottom Layer (*.GBL) w10: v1(30304.74,19680.82) 30328,19657.56 30328,18883.95 30322,18877.95 v1(30322,18782.08)
  other v1: 31559,21569.08
IMON_SLOT9: TP11I.1 U4I.1 U5.A29 | length 2765.9
  Top Layer (*.GTL) w5: TP11I.1@31105.5,20060.14 31314.44,20269.08 v1(31470,20269.08)
  Top Layer (*.GTL) w10: TP11I.1@31105.5,20060.14 31195.5,19970.14 31477.67,19970.14 31552.99,19894.82 31552.99,19700.82 31532.99,19680.82 U4I.1@31497.99,19680.82
  Bottom Layer (*.GBL) w5: U5.A29@31469.12,21693.84 31519.24,21693.84 31531,21682.08 31531,20950.91 31538.5,20943.41 31538.5,20920.24 31529,20910.74 31529,20609.49 31474.88,20555.37 31474.88,20518.08 31499.5,20493.46 31499.5,20281.58 31487,20269.08 v1(31470,20269.08)
IMON_SLOT10: TP11J.1 U4J.1 U5.A27 | length 8269.7
  Top Layer (*.GTL) w5: v1(30883.8,18491.88) 30918.6,18457.08 32369,18457.08 32446,18534.08 32695,18534.08 32815.54,18654.62 32971,18654.62 33063.82,18561.81 v1@33150,18561.81 ; v1(30944,21623.08) 30945,21624.08 31320,21624.08 v1(31357,21661.08)
  Top Layer (*.GTL) w10: TP11J.1@32495.5,20040.14 32565.5,19970.14 32845.5,19970.14 32913.32,19902.32 32945.49,19902.32 32952.99,19894.82 32952.99,19700.82 32932.99,19680.82 ; U4J.1@32897.99,19680.82 32932.99,19680.82 ; v1(33126,19682.08) 33124.74,19680.82 32932.99,19680.82
  Bottom Layer (*.GBL) w5: v1(30883.8,18491.88) 30883.8,18641.88 30884,18642.08 30884,20355.31 30976.77,20448.08 30976.77,20958.85 30987,20969.08 30987,21351.31 30944,21394.31 v1(30944,21623.08) ; v1(31357,21661.08) 31357,21687.08 31383.45,21713.53 U5.A27@31469.12,21713.53
  Bottom Layer (*.GBL) w10: v1(33126,19682.08) 33151,19657.08 33151,18895.95 33150,18894.95 v1(33150,18562.08)
IMON_SLOT11: TP11K.1 U4K.1 U5.A25 | length 10556.4
  Top Layer (*.GTL) w5: v1(30864,18472.08) 30899,18437.08 32377.28,18437.08 32459.28,18519.08 33693,18519.08 34165,18047.08 v1@34518,18047.08 ; v1(30916,21642.08) 30917,21643.08 31297,21643.08 v1(31318,21664.08)
  Top Layer (*.GTL) w10: TP11K.1@34294.99,20606.82 34294.99,20549.46 34345.49,20498.96 34345.49,19902.32 34352.99,19894.82 34352.99,19700.82 34332.99,19680.82 ; U4K.1@34297.99,19680.82 34332.99,19680.82 ; v1(34521,19681.08) 34520.74,19680.82 34332.99,19680.82
  Bottom Layer (*.GBL) w5: v1(30864,18472.08) 30864,20353.69 30967.77,20457.47 30967.77,20962.85 30974,20969.08 30974,21345.92 30931,21388.92 30931,21542.08 30916,21557.08 v1(30916,21642.08) ; v1(31318,21664.08) 31318,21685.08 31366.13,21733.21 U5.A25@31469.12,21733.21
  Bottom Layer (*.GBL) w10: v1(34518,18048.08) 34519,18049.08 34519,18663.08 34521,18665.08 v1(34521,19681.08)
IMON_SLOT12: TP11L.1 U4L.1 U5.A23 | length 12065.1
  Top Layer (*.GTL) w5: v1(30844.2,18491.88) 30855.51,18491.88 30875.51,18511.88 30916.49,18511.88 30957.14,18471.22 32363.14,18471.22 32440.14,18548.22 32695,18548.22 32817.86,18671.08 32974.73,18671.08 33059,18586.81 33678.63,18586.81 34180.36,18085.08 v1(35904,18085.08) ; v1@30888,21664.08 31273,21664.08 v1(31275,21662.08)
  Top Layer (*.GTL) w10: TP11L.1@35694.99,20606.82 35694.99,20549.46 35745.49,20498.96 35745.49,19902.32 35752.99,19894.82 35752.99,19700.82 35732.99,19680.82 ; U4L.1@35697.99,19680.82 35732.99,19680.82 ; v1(35904,19682.08) 35902.74,19680.82 35732.99,19680.82
  Bottom Layer (*.GBL) w5: v1(30844.2,18491.88) 30844.2,18641.88 30844,18642.08 30844,20352.08 30958.77,20466.85 30958.77,20966.85 30961,20969.08 30961,21340.54 30918,21383.54 30918,21536.69 30903,21551.69 30903,21555.08 30887,21571.08 v1(30887,21663.08) ; v1(31275,21662.08) 31275,21701.08 31326.82,21752.9 U5.A23@31469.12,21752.9
  Bottom Layer (*.GBL) w10: v1(35904,18085.08) v1(35904,19682.08)
MANUAL_PWR_OFF: C1.2 Q1A.1 Q1B.1 Q1C.1 Q1D.1 Q1E.1 Q1F.1 Q1G.1 Q1H.1 Q1I.1 Q1J.1 Q1K.1 Q1L.1 R2.2 S1.2 | length 21718.4
  Top Layer (*.GTL) w5: Q1G.1@28847.39,20399.08 28849.39,20397.08 v1(28893,20397.08) ; Q1A.1@28847.4,25650.26 28942.18,25650.26 v1(28944,25652.08) ; Q1H.1@30247.39,20399.08 30247.39,20536.47 v1(30248,20537.08) ; Q1B.1@30247.4,25650.26 30320.18,25650.26 v1(30321,25651.08) ; v1(31644,20463.08) 31647.39,20459.69 Q1I.1@31647.39,20399.08 ; Q1C.1@31647.4,25650.26 31715.82,25650.26 v1(31716,25650.08) ; Q1J.1@33047.39,20399.08 33047.39,20531.47 v1(33049,20533.08) ; Q1D.1@33047.4,25650.26 33113.18,25650.26 v1(33115,25652.08) ; v1(34447,20451.08) 34447.39,20450.69 Q1K.1@34447.39,20399.08 ; Q1E.1@34447.4,25650.26 34513.18,25650.26 v1(34514,25651.08) ; Q1L.1@35847.39,20399.08 35847.39,20470.47 v1(35850,20473.08) ; Q1F.1@35847.4,25650.26 35902.18,25650.26 v1(35903,25651.08)
  Mid-Layer 1 (*.G1) w5: v1(28893,20397.08) 29144,20397.08 29194,20447.08 30107,20447.08 30198,20538.08 30544,20538.08 30619,20463.08 v1(31644,20463.08) 31676,20463.08 31756,20383.08 32862,20383.08 33010,20531.08 33338,20531.08 33414.76,20454.32 34381.82,20454.32 34383.06,20453.08 34540,20453.08 34613,20526.08 34789,20526.08 34842,20473.08 v1(35850,20473.08) ; v1@28945,25651.08 v1(30321,25651.08) v1(34514,25651.08) v1(35903,25651.08)
  Bottom Layer (*.GBL) w5: 28635,20763.08 28635,20761.08 ; v1(28893,20397.08) 28893,20513.08 28743,20663.08 28701,20663.08 28635,20729.08 28635,20761.08 ; R2.2@28977,26083.08 28917,26023.08 28917,25974.08 28944,25947.08 v1(28944,25652.08) 28853,25561.08 28559,25561.08 28445,25447.08 28445,25274.08 28582.36,25136.71 28582.36,24795.44 28608,24769.81 28608,24269.08 28575,24236.08 28575,22713.81 28693,22595.81 28693,21838.08 28621.5,21766.58 28621.5,20774.58 28635,20761.08
  Bottom Layer (*.GBL) w10: R2.2@28977,26083.08 C1.2@28977,26165.68 28978.32,26167 S1.2@29086,26167
MANUAL_PWR_ON: Q2A.1 Q2B.1 Q2C.1 Q2D.1 Q2E.1 Q2F.1 Q2G.1 Q2H.1 Q2I.1 Q2J.1 Q2K.1 Q2L.1 R3.2 S2.2 | length 21747
  Top Layer (*.GTL) w5: Q2G.1@28552.39,20599.08 28598,20599.08 v1(28599,20600.08) ; Q2A.1@28552.4,25850.26 28552.4,25918.48 v1(28554,25920.08) ; v1(29952,20554.08) 29952.39,20554.47 Q2H.1@29952.39,20599.08 ; Q2B.1@29952.4,25850.26 29952.4,25920.48 v1(29954,25922.08) ; v1(31349,25920.08) 31352.4,25916.68 Q2C.1@31352.4,25850.26 ; v1(31352,20554.08) 31352.39,20554.47 Q2I.1@31352.39,20599.08 ; Q2D.1@32752.4,25850.26 32752.4,25918.48 v1(32754,25920.08) ; v1(32982,20685.08) 32982.9,20684.18 Q2J.1@32982.9,20636.4 ; v1(34151,20666.08) 34152.39,20664.69 Q2K.1@34152.39,20599.08 ; Q2E.1@34152.4,25850.26 34152.4,25917.48 v1(34155,25920.08) ; Q2L.1@35552.39,20599.08 35553,20599.69 v1(35553,20672.08) ; Q2F.1@35552.4,25850.26 35593.18,25850.26 35610,25867.08 v1(35610,25920.08)
  Mid-Layer 1 (*.G1) w5: v1@28552.4,25920.08 v1(28554,25920.08) v1(31349,25920.08) v1(32754,25920.08) v1(34155,25920.08) v1(35610,25920.08) ; v1(28599,20600.08) 28645,20554.08 v1(29952,20554.08) v1(31352,20554.08) 31448,20554.08 31473,20579.08 32473,20579.08 32577,20683.08 33006,20683.08 33127,20562.08 33925,20562.08 34029,20666.08 v1(34151,20666.08) 34153,20666.08 34283,20536.08 34538,20536.08 34577,20575.08 35308,20575.08 35405,20672.08 v1(35553,20672.08)
  Bottom Layer (*.GBL) w5: v1@28550,25916.08 28550,25564.81 28436,25450.81 28436,25270.35 28573.36,25132.99 28573.36,24791.71 28576,24789.08 28599,24766.08 28599,24272.81 28566,24239.81 28566,22710.08 28684,22592.08 28684,21841.81 28612.5,21770.31 28612.5,20774.58 28599,20761.08 v1(28599,20600.08) ; v1(28554,25920.08) 28554,26112.08 28953,26511.08 R3.2@28953,26772.08
  Bottom Layer (*.GBL) w10: R3.2@28953,26772.08 28954.08,26771 S2.2@29066,26771
NetC11_1: C11.1 D1.2 L2.1 U21.8
NetC11_2: C11.2 U21.6 | length 79.7
  Bottom Layer (*.GBL) w10: C11.2@33013.8,17913.34 33048.8,17913.34 33060.22,17924.76 U21.6@33060.22,17953.34
NetC14_2: C14.2 R33.1 | length 93.8
  Top Layer (*.GTL) w10: C14.2@33211.8,17818.34 33213.8,17816.34 v2(33213.8,17769.34)
  Bottom Layer (*.GBL) w10: v2(33213.8,17769.34) R33.1@33213.8,17813.34
NetC17_1: C17.1 U22.2 | length 111.8
  Bottom Layer (*.GBL) w30: U22.2@30960,17837.14 30960,17753.6 C17.1@30980,17733.6
NetC17_2: C17.2 U22.4 | length 107.7
  Bottom Layer (*.GBL) w30: U22.4@30860,17837.14 30860,17743.6 C17.2@30870,17733.6
NetC20_1: C20.1 R36.1 R39.2 U23.6 | length 215.7
  Bottom Layer (*.GBL) w10: C20.1@31503.98,17719 R39.2@31503.98,17784 ; R36.1@31503.98,17849 R39.2@31503.98,17784 ; U23.6@31583.37,17799.15 31519.14,17799.15 R39.2@31503.98,17784
NetD1_1: D1.1 U21.7
NetJ1A_13: J1A.13 J1A.14 K1A.14 TP10A.1 | length 3268.5
  Top Layer (*.GTL) w10: TP10A.1@28711,23831 28711,24235.75 ; TP10A.1@28711,23831 28711,24235.75 ; TP10A.1@28711,23831 28711,24235.75 ; TP10A.1@28711,23831 28711,24235.75 ; TP10A.1@28711,23831 28711,24235.75 ; TP10A.1@28711,23831 28711,24235.75 ; 28711,24235.75 K1A.14@28810,24334.75 ; 28711,24235.75 K1A.14@28810,24334.75 ; 28711,24235.75 K1A.14@28810,24334.75 ; 28711,24235.75 K1A.14@28810,24334.75 ; 28711,24235.75 K1A.14@28810,24334.75 ; 28711,24235.75 K1A.14@28810,24334.75
NetJ1B_13: J1B.13 J1B.14 K1B.14 TP10B.1 | length 3268.5
  Top Layer (*.GTL) w10: TP10B.1@30111,23831 30111,24235.75 ; TP10B.1@30111,23831 30111,24235.75 ; TP10B.1@30111,23831 30111,24235.75 ; TP10B.1@30111,23831 30111,24235.75 ; TP10B.1@30111,23831 30111,24235.75 ; TP10B.1@30111,23831 30111,24235.75 ; 30111,24235.75 K1B.14@30210,24334.75 ; 30111,24235.75 K1B.14@30210,24334.75 ; 30111,24235.75 K1B.14@30210,24334.75 ; 30111,24235.75 K1B.14@30210,24334.75 ; 30111,24235.75 K1B.14@30210,24334.75 ; 30111,24235.75 K1B.14@30210,24334.75
NetJ1C_13: J1C.13 J1C.14 K1C.14 TP10C.1 | length 615.8
  Top Layer (*.GTL) w10: TP10C.1@31074,24276 31141,24209 31484.25,24209 K1C.14@31610,24334.75
NetJ1D_13: J1D.13 J1D.14 K1D.14 TP10D.1 | length 3268.5
  Top Layer (*.GTL) w10: TP10D.1@32911,23831 32911,24235.75 ; TP10D.1@32911,23831 32911,24235.75 ; TP10D.1@32911,23831 32911,24235.75 ; TP10D.1@32911,23831 32911,24235.75 ; TP10D.1@32911,23831 32911,24235.75 ; TP10D.1@32911,23831 32911,24235.75 ; 32911,24235.75 K1D.14@33010,24334.75 ; 32911,24235.75 K1D.14@33010,24334.75 ; 32911,24235.75 K1D.14@33010,24334.75 ; 32911,24235.75 K1D.14@33010,24334.75 ; 32911,24235.75 K1D.14@33010,24334.75 ; 32911,24235.75 K1D.14@33010,24334.75
NetJ1E_13: J1E.13 J1E.14 K1E.14 TP10E.1 | length 3268.5
  Top Layer (*.GTL) w10: TP10E.1@34311,23831 34311,24235.75 ; TP10E.1@34311,23831 34311,24235.75 ; TP10E.1@34311,23831 34311,24235.75 ; TP10E.1@34311,23831 34311,24235.75 ; TP10E.1@34311,23831 34311,24235.75 ; TP10E.1@34311,23831 34311,24235.75 ; 34311,24235.75 K1E.14@34410,24334.75 ; 34311,24235.75 K1E.14@34410,24334.75 ; 34311,24235.75 K1E.14@34410,24334.75 ; 34311,24235.75 K1E.14@34410,24334.75 ; 34311,24235.75 K1E.14@34410,24334.75 ; 34311,24235.75 K1E.14@34410,24334.75
NetJ1F_13: J1F.13 J1F.14 K1F.14 TP10F.1 | length 3268.5
  Top Layer (*.GTL) w10: TP10F.1@35711,23831 35711,24235.75 ; TP10F.1@35711,23831 35711,24235.75 ; TP10F.1@35711,23831 35711,24235.75 ; TP10F.1@35711,23831 35711,24235.75 ; TP10F.1@35711,23831 35711,24235.75 ; TP10F.1@35711,23831 35711,24235.75 ; 35711,24235.75 K1F.14@35810,24334.75 ; 35711,24235.75 K1F.14@35810,24334.75 ; 35711,24235.75 K1F.14@35810,24334.75 ; 35711,24235.75 K1F.14@35810,24334.75 ; 35711,24235.75 K1F.14@35810,24334.75 ; 35711,24235.75 K1F.14@35810,24334.75
NetJ1G_13: J1G.13 J1G.14 K1G.14 TP10G.1 | length 544.8
  Bottom Layer (*.GBL) w12: TP10G.1@28710.99,18579.82 28710.99,18984.57 K1G.14@28809.99,19083.57
NetJ1H_13: J1H.13 J1H.14 K1H.14 TP10H.1 | length 544.8
  Bottom Layer (*.GBL) w12: TP10H.1@30110.99,18579.82 30110.99,18984.57 K1H.14@30209.99,19083.57
NetJ1I_13: J1I.13 J1I.14 K1I.14 TP10I.1 | length 544.8
  Bottom Layer (*.GBL) w5: TP10I.1@31510.99,18579.82 31510.99,18984.57 K1I.14@31609.99,19083.57
NetJ1J_13: J1J.13 J1J.14 K1J.14 TP10J.1 | length 544.8
  Mid-Layer 1 (*.G1) w10: TP10J.1@32910.99,18579.82 32910.99,18984.57 K1J.14@33009.99,19083.57
NetJ1K_13: J1K.13 J1K.14 K1K.14 TP10K.1 | length 544.8
  Mid-Layer 1 (*.G1) w10: TP10K.1@34310.99,18579.82 34310.99,18984.57 K1K.14@34409.99,19083.57
NetJ1L_13: J1L.13 J1L.14 K1L.14 TP10L.1 | length 544.8
  Mid-Layer 1 (*.G1) w10: TP10L.1@35710.99,18579.82 35710.99,18984.57 K1L.14@35809.99,19083.57
NetJ2_5: J2.5 R5.1 | length 279.5
  Bottom Layer (*.GBL) w5: R5.1@30456,26401.48 30465.63,26411.11 30641.03,26411.11 J2.5@30705,26475.08
NetJ3_1: J3.1 L1.1 | length 377.2
  Bottom Layer (*.GBL) w10: L1.1@34397,26564.08 34736,26564.08 J3.1@34763,26537.08
NetJ3_2: J3.2 L1.3 | length 279.7
  Bottom Layer (*.GBL) w10: L1.3@34397,26464.08 34532,26464.08 34565,26497.08 J3.2@34663,26497.08
NetJ3_3: J3.3 L1.6 | length 425.2
  Bottom Layer (*.GBL) w10: L1.6@34397,26314.08 34567,26314.08 34626.5,26373.58 34679.5,26373.58 J3.3@34763,26457.08
NetJ3_6: J3.6 L1.8 | length 316.9
  Bottom Layer (*.GBL) w10: L1.8@34397,26214.08 34540,26214.08 J3.6@34663,26337.08
NetJ3_9: J3.9 R6.2 | length 78
  Top Layer (*.GTL) w5: J3.9@34858,26667.08 R6.2@34936,26667.08
NetJ3_12: J3.12 R7.2 | length 91
  Top Layer (*.GTL) w5: J3.12@34858,26127.08 R7.2@34949,26127.08
NetK1A_11: K1A.11 R4A.2 U4A.4 | length 265.6
  Top Layer (*.GTL) w10: 28510,24889 28555,24889 28565,24899 28565,24959 U4A.4@28612,25006
  Top Layer (*.GTL) w50: v3(28510,24839) 28510,24889 R4A.2@28510,24919
NetK1B_11: K1B.11 R4B.2 U4B.4 | length 265.6
  Top Layer (*.GTL) w10: 29910,24889 29955,24889 29965,24899 29965,24959 U4B.4@30012,25006
  Top Layer (*.GTL) w50: v3(29910,24839) 29910,24889 R4B.2@29910,24919
NetK1C_11: K1C.11 R4C.2 U4C.4 | length 265.6
  Top Layer (*.GTL) w10: 31310,24889 31355,24889 31365,24899 31365,24959 U4C.4@31412,25006
  Top Layer (*.GTL) w50: v3(31310,24839) 31310,24889 R4C.2@31310,24919
NetK1D_11: K1D.11 R4D.2 U4D.4 | length 271.6
  Top Layer (*.GTL) w10: 32710,24889 32755,24889 32765,24899 32765,24959 U4D.4@32812,25006
  Top Layer (*.GTL) w50: v3(32710,24833) 32710,24889 R4D.2@32710,24919
NetK1E_11: K1E.11 R4E.2 U4E.4 | length 265.6
  Top Layer (*.GTL) w10: 34110,24889 34155,24889 34165,24899 34165,24959 U4E.4@34212,25006
  Top Layer (*.GTL) w50: v3(34110,24839) 34110,24889 R4E.2@34110,24919
NetK1F_11: K1F.11 R4F.2 U4F.4 | length 265.6
  Top Layer (*.GTL) w10: 35510,24889 35555,24889 35565,24899 35565,24959 U4F.4@35612,25006
  Top Layer (*.GTL) w50: v3(35510,24839) 35510,24889 R4F.2@35510,24919
NetK1G_11: K1G.11 R4G.2 U4G.4 | length 265.6
  Top Layer (*.GTL) w10: 28509.99,19637.82 28554.99,19637.82 28564.99,19647.82 28564.99,19707.82 U4G.4@28611.99,19754.82
  Top Layer (*.GTL) w50: v3(28509.99,19587.82) 28509.99,19637.82 R4G.2@28509.99,19667.82
NetK1H_11: K1H.11 R4H.2 U4H.4 | length 265.6
  Top Layer (*.GTL) w10: 29909.99,19637.82 29954.99,19637.82 29964.99,19647.82 29964.99,19707.82 U4H.4@30011.99,19754.82
  Top Layer (*.GTL) w50: v3(29909.99,19587.82) 29909.99,19637.82 R4H.2@29909.99,19667.82